# Altium PCB NNLightSwitcher.PcbDoc (part 2 of 3)
Units mil, origin at the board's own origin, x right, y up, seen from the top; angles counter-clockwise.
Board outline 1590 x 2535 mil, 2 copper layers (Top Layer, Bottom Layer); 347 components, 370 nets, 1639 pads, 0 vias.
Unrouted connection lines stored in the file: 1035.
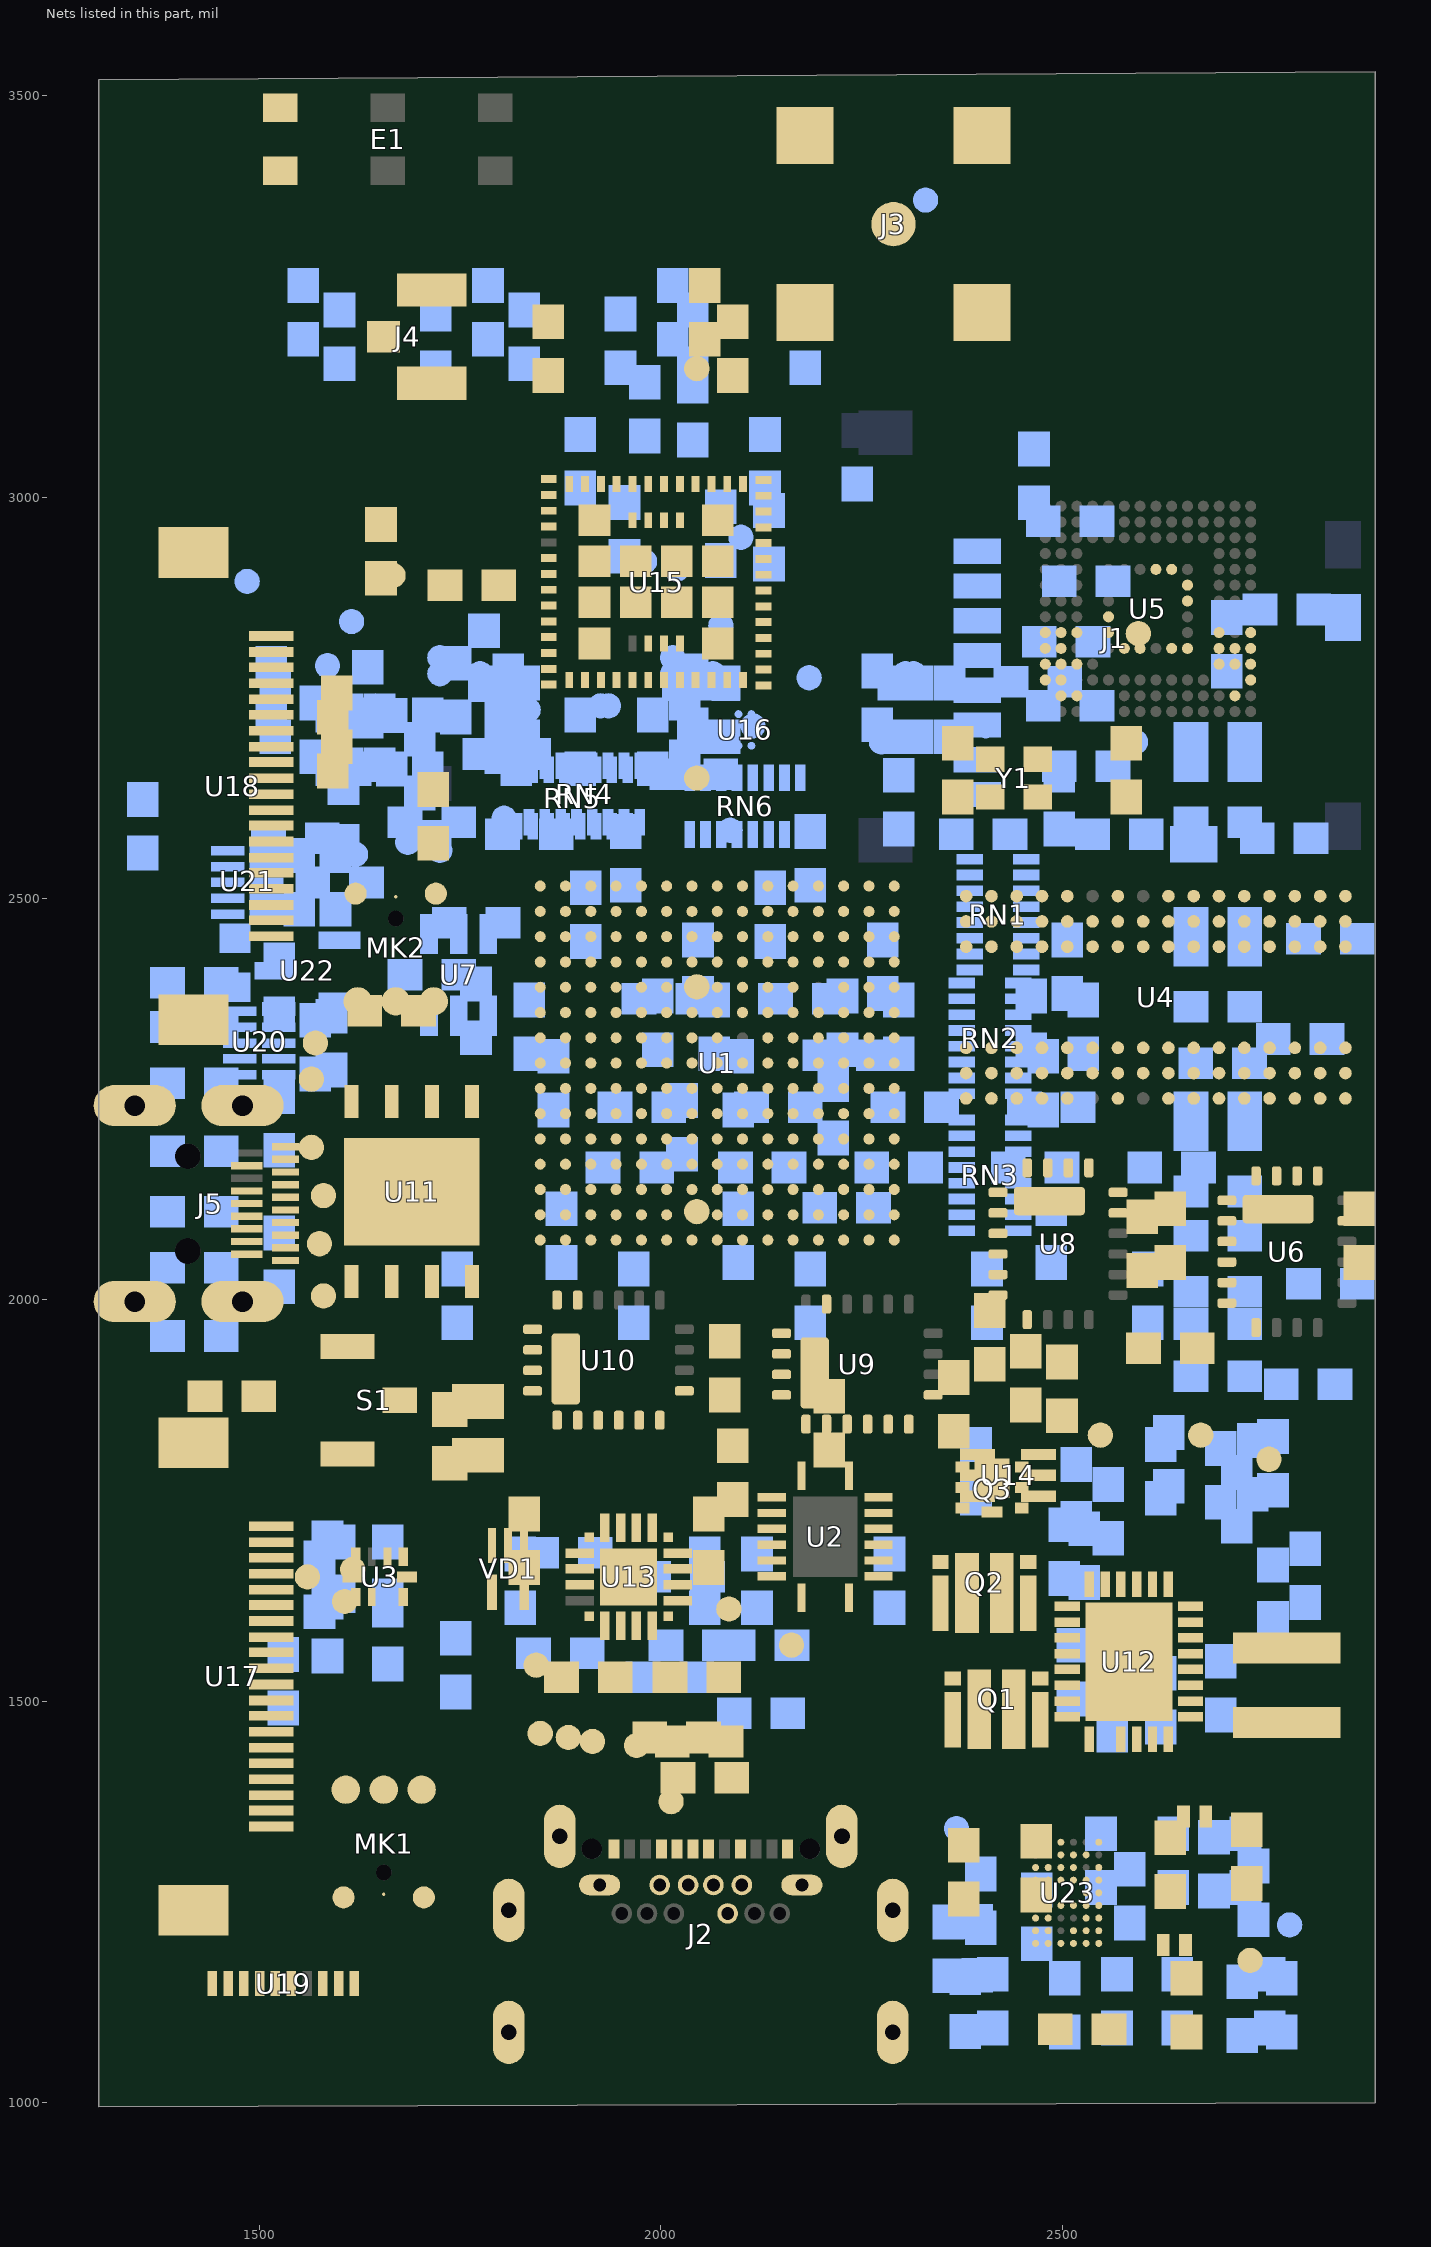
[diagram p2: the nets of this part, all layers, seen from the top]

## Part data
C1 C3 C5 C6 C7 C8 C9 C12 C13 C14 C17 C19 C20 C24 C26 C27 C28 C32 C33 C34 C43 C46 C48 C49 C50 C51 C52 C53 C55 C58 C69: "CAP, CERM, 100 pF, 25 V,+/- 5%, C0G/NP0, 0201", Alternate PartNumber=C0603C0G1E101J030BA, Cap_Case=0201, Manufacturer=Yageo, TempCo=C0G/NP0, Tolerance_%=5%, Value2=25V, ValueDisplayed="470 nF", AEC Category=Q200, AEC Grade=N/A, AEC Qualified=N, Cap_F=100pF, ComponentLink1Description="Datasheet link", ComponentLink1URL=http://www.yageo.com/documents/recent/UPY-GP_NP0_16V-to-50V_16.pdf, CompType=Capacitor, MountType=SMT, PackageReference=0201, PartNumber=CC0201JRNPO8BN101, Polarized=N, RoHS=Y, SizeArea_mm2=0.18, SizeAreaWB_mm2=2.08, SizeX_mm=0.6, SizeY_mm=0.3, SizeZ_mm=0.26, TaMax_C=125°C, TaMin_C=-55°C, Technology=Ceramic, U/M=EA, VDC_V=25V
C2 C4 C10 C15 C16 C18 C23 C25 C31 C35 C42 C45 C54 C57 C61 C63 C65 C67 C95 C97: "CAP, CERM, 100 pF, 25 V,+/- 5%, C0G/NP0, 0201", Alternate PartNumber=C0603C0G1E101J030BA, Cap_Case=0201, Manufacturer=Yageo, TempCo=C0G/NP0, Tolerance_%=5%, Value2=25V, ValueDisplayed="4.7 uF", AEC Category=Q200, AEC Grade=N/A, AEC Qualified=N, Cap_F=100pF, ComponentLink1Description="Datasheet link", ComponentLink1URL=http://www.yageo.com/documents/recent/UPY-GP_NP0_16V-to-50V_16.pdf, CompType=Capacitor, MountType=SMT, PackageReference=0201, PartNumber=CC0201JRNPO8BN101, Polarized=N, RoHS=Y, SizeArea_mm2=0.18, SizeAreaWB_mm2=2.08, SizeX_mm=0.6, SizeY_mm=0.3, SizeZ_mm=0.26, TaMax_C=125°C, TaMin_C=-55°C, Technology=Ceramic, U/M=EA, VDC_V=25V
C11 C21 C22 C29 C30 C60 C62 C64 C66 C68: "CAP, CERM, 100 pF, 25 V,+/- 5%, C0G/NP0, 0201", Alternate PartNumber=C0603C0G1E101J030BA, Cap_Case=0201, Manufacturer=Yageo, TempCo=C0G/NP0, Tolerance_%=5%, Value2=25V, ValueDisplayed="47 uF", AEC Category=Q200, AEC Grade=N/A, AEC Qualified=N, Cap_F=100pF, ComponentLink1Description="Datasheet link", ComponentLink1URL=http://www.yageo.com/documents/recent/UPY-GP_NP0_16V-to-50V_16.pdf, CompType=Capacitor, MountType=SMT, PackageReference=0201, PartNumber=CC0201JRNPO8BN101, Polarized=N, RoHS=Y, SizeArea_mm2=0.18, SizeAreaWB_mm2=2.08, SizeX_mm=0.6, SizeY_mm=0.3, SizeZ_mm=0.26, TaMax_C=125°C, TaMin_C=-55°C, Technology=Ceramic, U/M=EA, VDC_V=25V
C36 C38: "CAP, CERM, 0.01 µF, 50 V,+/- 10%, X7R, 0402", Alternate PartNumber=C1005X7R1C103K050BA, Cap_Case=0402, Manufacturer=Walsin, TempCo=X7R, Tolerance_%=10%, Value2=50V, ValueDisplayed="1 uF", AEC Category=Q200, AEC Grade=N/A, AEC Qualified=N, Cap_F=10nF, ComponentLink1Description="Datasheet link", ComponentLink1URL=http://www.passivecomponent.com/indexsea/0402B103K500CT-IN.pdf, CompType=Capacitor, MountType=SMT, PackageReference=0402, PartNumber=0402B103K500CT, Polarized=N, RoHS=Y, SizeArea_mm2=0.5, SizeAreaWB_mm2=3, SizeX_mm=1, SizeY_mm=0.5, SizeZ_mm=0.6, TaMax_C=125°C, TaMin_C=-55°C, Technology=Ceramic, U/M=EA, VDC_V=50V
C37 C39 C93 C94 C96: "CAP, CERM, 100 pF, 25 V,+/- 5%, C0G/NP0, 0201", Alternate PartNumber=C0603C0G1E101J030BA, Cap_Case=0201, Manufacturer=Yageo, TempCo=C0G/NP0, Tolerance_%=5%, Value2=25V, ValueDisplayed="0.1 uF", AEC Category=Q200, AEC Grade=N/A, AEC Qualified=N, Cap_F=100pF, ComponentLink1Description="Datasheet link", ComponentLink1URL=http://www.yageo.com/documents/recent/UPY-GP_NP0_16V-to-50V_16.pdf, CompType=Capacitor, MountType=SMT, PackageReference=0201, PartNumber=CC0201JRNPO8BN101, Polarized=N, RoHS=Y, SizeArea_mm2=0.18, SizeAreaWB_mm2=2.08, SizeX_mm=0.6, SizeY_mm=0.3, SizeZ_mm=0.26, TaMax_C=125°C, TaMin_C=-55°C, Technology=Ceramic, U/M=EA, VDC_V=25V
C40 C41 C44 C47 C56 C59: "CAP, CERM, 100 pF, 25 V,+/- 5%, C0G/NP0, 0201", Alternate PartNumber=C0603C0G1E101J030BA, Cap_Case=0201, Manufacturer=Yageo, TempCo=C0G/NP0, Tolerance_%=5%, Value2=25V, ValueDisplayed="10 nF", AEC Category=Q200, AEC Grade=N/A, AEC Qualified=N, Cap_F=100pF, ComponentLink1Description="Datasheet link", ComponentLink1URL=http://www.yageo.com/documents/recent/UPY-GP_NP0_16V-to-50V_16.pdf, CompType=Capacitor, MountType=SMT, PackageReference=0201, PartNumber=CC0201JRNPO8BN101, Polarized=N, RoHS=Y, SizeArea_mm2=0.18, SizeAreaWB_mm2=2.08, SizeX_mm=0.6, SizeY_mm=0.3, SizeZ_mm=0.26, TaMax_C=125°C, TaMin_C=-55°C, Technology=Ceramic, U/M=EA, VDC_V=25V
C70: "CAP, CERM, 0.5 pF, 50 V,+/- 20%, C0G/NP0, 0402", Cap_Case=0402, Manufacturer=MuRata, Supplier Part Number 1=490-8105-1-ND, TempCo=C0G/NP0, Tolerance_%=20%, Value2=50V, ValueDisplayed="2.2 nF 2 kV", AEC Category=Q200, AEC Grade=N/A, AEC Qualified=N, Cap_F=0.5pF, ComponentLink1Description="Datasheet link", ComponentLink1URL=https://search.murata.co.jp/Ceramy/image/img/A01X/G101/ENG/GJM1555C1HR50BB01-01.pdf, CompType=Capacitor, Green_EU RoHS=Passed, Green_EU RoHS-2=Incomplete, Green_Lifecycle=Active, Green_REACh=Passed, MountType=SMT, PackageReference=0402, PartNumber=GJM1555C1HR50BB01J, Polarized=N, RoHS=Y, SizeArea_mm2=0.5, SizeAreaWB_mm2=3, SizeX_mm=1, SizeY_mm=0.5, SizeZ_mm=0.6, Supplier 1=Digi-Key, Supplier 2=Mouser, Supplier Part Number 2=81-GJM1555C1HR50BB1J, TaMax_C=125°C, TaMin_C=-55°C, Technology=Ceramic, U/M=EA, VDC_V=50V
C71 C77 C78 C79: "CAP, CERM, 0.5 pF, 50 V,+/- 20%, C0G/NP0, 0402", Cap_Case=0402, Manufacturer=MuRata, Supplier Part Number 1=490-8105-1-ND, TempCo=C0G/NP0, Tolerance_%=20%, Value2=50V, ValueDisplayed="0.1 uF", AEC Category=Q200, AEC Grade=N/A, AEC Qualified=N, Cap_F=0.5pF, ComponentLink1Description="Datasheet link", ComponentLink1URL=https://search.murata.co.jp/Ceramy/image/img/A01X/G101/ENG/GJM1555C1HR50BB01-01.pdf, CompType=Capacitor, Green_EU RoHS=Passed, Green_EU RoHS-2=Incomplete, Green_Lifecycle=Active, Green_REACh=Passed, MountType=SMT, PackageReference=0402, PartNumber=GJM1555C1HR50BB01J, Polarized=N, RoHS=Y, SizeArea_mm2=0.5, SizeAreaWB_mm2=3, SizeX_mm=1, SizeY_mm=0.5, SizeZ_mm=0.6, Supplier 1=Digi-Key, Supplier 2=Mouser, Supplier Part Number 2=81-GJM1555C1HR50BB1J, TaMax_C=125°C, TaMin_C=-55°C, Technology=Ceramic, U/M=EA, VDC_V=50V
C72: "CAP, CERM, 0.5 pF, 50 V,+/- 20%, C0G/NP0, 0402", Cap_Case=0402, Manufacturer=MuRata, Supplier Part Number 1=490-8105-1-ND, TempCo=C0G/NP0, Tolerance_%=20%, Value2=50V, ValueDisplayed="22 uF", AEC Category=Q200, AEC Grade=N/A, AEC Qualified=N, Cap_F=0.5pF, ComponentLink1Description="Datasheet link", ComponentLink1URL=https://search.murata.co.jp/Ceramy/image/img/A01X/G101/ENG/GJM1555C1HR50BB01-01.pdf, CompType=Capacitor, Green_EU RoHS=Passed, Green_EU RoHS-2=Incomplete, Green_Lifecycle=Active, Green_REACh=Passed, MountType=SMT, PackageReference=0402, PartNumber=GJM1555C1HR50BB01J, Polarized=N, RoHS=Y, SizeArea_mm2=0.5, SizeAreaWB_mm2=3, SizeX_mm=1, SizeY_mm=0.5, SizeZ_mm=0.6, Supplier 1=Digi-Key, Supplier 2=Mouser, Supplier Part Number 2=81-GJM1555C1HR50BB1J, TaMax_C=125°C, TaMin_C=-55°C, Technology=Ceramic, U/M=EA, VDC_V=50V
C73: "CAP, CERM, 0.5 pF, 50 V,+/- 20%, C0G/NP0, 0402", Cap_Case=0402, Manufacturer=MuRata, Supplier Part Number 1=490-8105-1-ND, TempCo=C0G/NP0, Tolerance_%=20%, Value2=50V, ValueDisplayed="10 uF", AEC Category=Q200, AEC Grade=N/A, AEC Qualified=N, Cap_F=0.5pF, ComponentLink1Description="Datasheet link", ComponentLink1URL=https://search.murata.co.jp/Ceramy/image/img/A01X/G101/ENG/GJM1555C1HR50BB01-01.pdf, CompType=Capacitor, Green_EU RoHS=Passed, Green_EU RoHS-2=Incomplete, Green_Lifecycle=Active, Green_REACh=Passed, MountType=SMT, PackageReference=0402, PartNumber=GJM1555C1HR50BB01J, Polarized=N, RoHS=Y, SizeArea_mm2=0.5, SizeAreaWB_mm2=3, SizeX_mm=1, SizeY_mm=0.5, SizeZ_mm=0.6, Supplier 1=Digi-Key, Supplier 2=Mouser, Supplier Part Number 2=81-GJM1555C1HR50BB1J, TaMax_C=125°C, TaMin_C=-55°C, Technology=Ceramic, U/M=EA, VDC_V=50V
C74 C75: "CAP, CERM, 0.5 pF, 50 V,+/- 20%, C0G/NP0, 0402", Cap_Case=0402, Manufacturer=MuRata, Supplier Part Number 1=490-8105-1-ND, TempCo=C0G/NP0, Tolerance_%=20%, Value2=50V, ValueDisplayed="10 pF", AEC Category=Q200, AEC Grade=N/A, AEC Qualified=N, Cap_F=0.5pF, ComponentLink1Description="Datasheet link", ComponentLink1URL=https://search.murata.co.jp/Ceramy/image/img/A01X/G101/ENG/GJM1555C1HR50BB01-01.pdf, CompType=Capacitor, Green_EU RoHS=Passed, Green_EU RoHS-2=Incomplete, Green_Lifecycle=Active, Green_REACh=Passed, MountType=SMT, PackageReference=0402, PartNumber=GJM1555C1HR50BB01J, Polarized=N, RoHS=Y, SizeArea_mm2=0.5, SizeAreaWB_mm2=3, SizeX_mm=1, SizeY_mm=0.5, SizeZ_mm=0.6, Supplier 1=Digi-Key, Supplier 2=Mouser, Supplier Part Number 2=81-GJM1555C1HR50BB1J, TaMax_C=125°C, TaMin_C=-55°C, Technology=Ceramic, U/M=EA, VDC_V=50V
C76: "CAP, CERM, 0.5 pF, 50 V,+/- 20%, C0G/NP0, 0402", Cap_Case=0402, Manufacturer=MuRata, Supplier Part Number 1=490-8105-1-ND, TempCo=C0G/NP0, Tolerance_%=20%, Value2=50V, ValueDisplayed="0.047 uF", AEC Category=Q200, AEC Grade=N/A, AEC Qualified=N, Cap_F=0.5pF, ComponentLink1Description="Datasheet link", ComponentLink1URL=https://search.murata.co.jp/Ceramy/image/img/A01X/G101/ENG/GJM1555C1HR50BB01-01.pdf, CompType=Capacitor, Green_EU RoHS=Passed, Green_EU RoHS-2=Incomplete, Green_Lifecycle=Active, Green_REACh=Passed, MountType=SMT, PackageReference=0402, PartNumber=GJM1555C1HR50BB01J, Polarized=N, RoHS=Y, SizeArea_mm2=0.5, SizeAreaWB_mm2=3, SizeX_mm=1, SizeY_mm=0.5, SizeZ_mm=0.6, Supplier 1=Digi-Key, Supplier 2=Mouser, Supplier Part Number 2=81-GJM1555C1HR50BB1J, TaMax_C=125°C, TaMin_C=-55°C, Technology=Ceramic, U/M=EA, VDC_V=50V
C80: "CAP, CERM, 0.5 pF, 50 V,+/- 20%, C0G/NP0, 0402", Cap_Case=0402, Manufacturer=MuRata, Supplier Part Number 1=490-8105-1-ND, TempCo=C0G/NP0, Tolerance_%=20%, Value2=50V, ValueDisplayed="4.7 uF", AEC Category=Q200, AEC Grade=N/A, AEC Qualified=N, Cap_F=0.5pF, ComponentLink1Description="Datasheet link", ComponentLink1URL=https://search.murata.co.jp/Ceramy/image/img/A01X/G101/ENG/GJM1555C1HR50BB01-01.pdf, CompType=Capacitor, Green_EU RoHS=Passed, Green_EU RoHS-2=Incomplete, Green_Lifecycle=Active, Green_REACh=Passed, MountType=SMT, PackageReference=0402, PartNumber=GJM1555C1HR50BB01J, Polarized=N, RoHS=Y, SizeArea_mm2=0.5, SizeAreaWB_mm2=3, SizeX_mm=1, SizeY_mm=0.5, SizeZ_mm=0.6, Supplier 1=Digi-Key, Supplier 2=Mouser, Supplier Part Number 2=81-GJM1555C1HR50BB1J, TaMax_C=125°C, TaMin_C=-55°C, Technology=Ceramic, U/M=EA, VDC_V=50V
C81: "CAP, CERM, 0.5 pF, 50 V,+/- 20%, C0G/NP0, 0402", Cap_Case=0402, Manufacturer=MuRata, Supplier Part Number 1=490-8105-1-ND, TempCo=C0G/NP0, Tolerance_%=20%, Value2=50V, ValueDisplayed="1.0 uF", AEC Category=Q200, AEC Grade=N/A, AEC Qualified=N, Cap_F=0.5pF, ComponentLink1Description="Datasheet link", ComponentLink1URL=https://search.murata.co.jp/Ceramy/image/img/A01X/G101/ENG/GJM1555C1HR50BB01-01.pdf, CompType=Capacitor, Green_EU RoHS=Passed, Green_EU RoHS-2=Incomplete, Green_Lifecycle=Active, Green_REACh=Passed, MountType=SMT, PackageReference=0402, PartNumber=GJM1555C1HR50BB01J, Polarized=N, RoHS=Y, SizeArea_mm2=0.5, SizeAreaWB_mm2=3, SizeX_mm=1, SizeY_mm=0.5, SizeZ_mm=0.6, Supplier 1=Digi-Key, Supplier 2=Mouser, Supplier Part Number 2=81-GJM1555C1HR50BB1J, TaMax_C=125°C, TaMin_C=-55°C, Technology=Ceramic, U/M=EA, VDC_V=50V
C82: "CAP, CERM, 8.2 pF, 50 V,+/- 3%, C0G/NP0, 0402", Alternate Manufacturer=MuRata, Alternate PartNumber=GRM1555C1H8R2CA01D, Cap_Case=0402, Manufacturer=Walsin, TempCo=C0G/NP0, Tolerance_%=3%, Value2=50V, ValueDisplayed=8.2pF, AEC Category=Q200, AEC Grade=N/A, AEC Qualified=N, Cap_F=8.2pF, ComponentLink1Description="Datasheet link", ComponentLink1URL=http://www.passivecomponent.com/indexsea/0402N8R2C500CT-IN.pdf, CompType=Capacitor, MountType=SMT, PackageReference=0402, PartNumber=0402N8R2C500CT, Polarized=N, RoHS=Y, SizeArea_mm2=0.5, SizeAreaWB_mm2=3, SizeX_mm=1, SizeY_mm=0.5, SizeZ_mm=0.6, TaMax_C=125°C, TaMin_C=-55°C, Technology=Ceramic, U/M=EA, VDC_V=50V
C83 C84: "CAP, CERM, 0.5 pF, 50 V,+/- 20%, C0G/NP0, 0402", Cap_Case=0402, Manufacturer=MuRata, Supplier Part Number 1=490-8105-1-ND, TempCo=C0G/NP0, Tolerance_%=20%, Value2=50V, ValueDisplayed=0.5pF, AEC Category=Q200, AEC Grade=N/A, AEC Qualified=N, Cap_F=0.5pF, ComponentLink1Description="Datasheet link", ComponentLink1URL=https://search.murata.co.jp/Ceramy/image/img/A01X/G101/ENG/GJM1555C1HR50BB01-01.pdf, CompType=Capacitor, Green_EU RoHS=Passed, Green_EU RoHS-2=Incomplete, Green_Lifecycle=Active, Green_REACh=Passed, MountType=SMT, PackageReference=0402, PartNumber=GJM1555C1HR50BB01J, Polarized=N, RoHS=Y, SizeArea_mm2=0.5, SizeAreaWB_mm2=3, SizeX_mm=1, SizeY_mm=0.5, SizeZ_mm=0.6, Supplier 1=Digi-Key, Supplier 2=Mouser, Supplier Part Number 2=81-GJM1555C1HR50BB1J, TaMax_C=125°C, TaMin_C=-55°C, Technology=Ceramic, U/M=EA, VDC_V=50V
C85 C86 C87 C88 C89 C90: "CAP, CERM, 0.5 pF, 50 V,+/- 20%, C0G/NP0, 0402", Cap_Case=0402, Manufacturer=MuRata, Supplier Part Number 1=490-8105-1-ND, TempCo=C0G/NP0, Tolerance_%=20%, Value2=50V, ValueDisplayed="0 pF", AEC Category=Q200, AEC Grade=N/A, AEC Qualified=N, Cap_F=0.5pF, ComponentLink1Description="Datasheet link", ComponentLink1URL=https://search.murata.co.jp/Ceramy/image/img/A01X/G101/ENG/GJM1555C1HR50BB01-01.pdf, CompType=Capacitor, Green_EU RoHS=Passed, Green_EU RoHS-2=Incomplete, Green_Lifecycle=Active, Green_REACh=Passed, MountType=SMT, PackageReference=0402, PartNumber=GJM1555C1HR50BB01J, Polarized=N, RoHS=Y, SizeArea_mm2=0.5, SizeAreaWB_mm2=3, SizeX_mm=1, SizeY_mm=0.5, SizeZ_mm=0.6, Supplier 1=Digi-Key, Supplier 2=Mouser, Supplier Part Number 2=81-GJM1555C1HR50BB1J, TaMax_C=125°C, TaMin_C=-55°C, Technology=Ceramic, U/M=EA, VDC_V=50V
C91: "CAP, CERM, 2.2 pF, 50 V,+/- 4.5%, C0G/NP0, 0402", Alternate Manufacturer=MuRata, Alternate PartNumber=GRM1555C1H2R2BA01D, Cap_Case=0402, TempCo=C0G/NP0, Tolerance_%=4.5%, Value2=50V, ValueDisplayed=2.2pF, AEC Category=Q200, AEC Grade=N/A, AEC Qualified=N, Cap_F=2.2pF, ComponentLink1Description="Datasheet link", ComponentLink1URL=https://psearch.en.murata.com/capacitor/product/GJM1555C1H2R2BB01%23.pdf, CompType=Capacitor, Manufacturer=MuRata, MountType=SMT, PackageReference=0402, PartNumber=GJM1555C1H2R2BB01D, Polarized=N, RoHS=Y, SizeArea_mm2=0.5, SizeAreaWB_mm2=3, SizeX_mm=1, SizeY_mm=0.5, SizeZ_mm=0.6, TaMax_C=125°C, TaMin_C=-55°C, Technology=Ceramic, U/M=EA, VDC_V=50V
C92: "CAP, CERM, 1 pF, 50 V, +/- 10%, C0G/NP0, 0402", Alternate Manufacturer=----, Cap_Case=0402, Manufacturer=MuRata, PartNumber=GRM1555C1H1R0BA01D, Supplier Part Number 1=490-6206-1-ND, TempCo=C0G/NP0, Tolerance_%=10%, Value1=Unknown, Value2=50V, ValueDisplayed=1pF, AEC Category=Q200, AEC Qualified=?, Alternate PartNumber=----, Cap_F=1pF, ComponentLink1Description="Datasheet link", ComponentLink1URL=http://psearch.murata.com/capacitor/product/GRM1555C1H1R0BA01%23.pdf, CompType=Capacitor, LatestRevisionDate=2017-03-09, MountType=SMT, PackageReference=0402, Polarized=N, Published=2008-06-19, Publisher="Texas Instruments", RoHS=Y, SizeArea_mm2=0.5, SizeAreaWB_mm2=3, SizeX_mm=1, SizeY_mm=0.5, SizeZ_mm=0.6, Supplier 1=Digi-Key, Supplier 2=Mouser, Supplier Part Number 2=81-GRM1555C1H1R0BA1D, TaMax_C=125°C, TaMin_C=-55°C, Technology=Ceramic, U/M=EA, VDC_V=50V
C98: "CAP, CERM, 100 pF, 25 V,+/- 5%, C0G/NP0, 0201", Alternate PartNumber=C0603C0G1E101J030BA, Cap_Case=0201, Manufacturer=Yageo, TempCo=C0G/NP0, Tolerance_%=5%, Value2=25V, ValueDisplayed="15 pF", AEC Category=Q200, AEC Grade=N/A, AEC Qualified=N, Cap_F=100pF, ComponentLink1Description="Datasheet link", ComponentLink1URL=http://www.yageo.com/documents/recent/UPY-GP_NP0_16V-to-50V_16.pdf, CompType=Capacitor, MountType=SMT, PackageReference=0201, PartNumber=CC0201JRNPO8BN101, Polarized=N, RoHS=Y, SizeArea_mm2=0.18, SizeAreaWB_mm2=2.08, SizeX_mm=0.6, SizeY_mm=0.3, SizeZ_mm=0.26, TaMax_C=125°C, TaMin_C=-55°C, Technology=Ceramic, U/M=EA, VDC_V=25V
C99 C100 C101 C102: "CAP, CERM, 100 pF, 25 V,+/- 5%, C0G/NP0, 0201", Alternate PartNumber=C0603C0G1E101J030BA, Cap_Case=0201, Manufacturer=Yageo, TempCo=C0G/NP0, Tolerance_%=5%, Value2=25V, ValueDisplayed="100 nF", AEC Category=Q200, AEC Grade=N/A, AEC Qualified=N, Cap_F=100pF, ComponentLink1Description="Datasheet link", ComponentLink1URL=http://www.yageo.com/documents/recent/UPY-GP_NP0_16V-to-50V_16.pdf, CompType=Capacitor, MountType=SMT, PackageReference=0201, PartNumber=CC0201JRNPO8BN101, Polarized=N, RoHS=Y, SizeArea_mm2=0.18, SizeAreaWB_mm2=2.08, SizeX_mm=0.6, SizeY_mm=0.3, SizeZ_mm=0.26, TaMax_C=125°C, TaMin_C=-55°C, Technology=Ceramic, U/M=EA, VDC_V=25V
C103 C104: "CAP, CERM, 100 pF, 25 V,+/- 5%, C0G/NP0, 0201", Alternate PartNumber=C0603C0G1E101J030BA, Cap_Case=0201, Manufacturer=Yageo, TempCo=C0G/NP0, Tolerance_%=5%, Value2=25V, ValueDisplayed="15 nF", AEC Category=Q200, AEC Grade=N/A, AEC Qualified=N, Cap_F=100pF, ComponentLink1Description="Datasheet link", ComponentLink1URL=http://www.yageo.com/documents/recent/UPY-GP_NP0_16V-to-50V_16.pdf, CompType=Capacitor, MountType=SMT, PackageReference=0201, PartNumber=CC0201JRNPO8BN101, Polarized=N, RoHS=Y, SizeArea_mm2=0.18, SizeAreaWB_mm2=2.08, SizeX_mm=0.6, SizeY_mm=0.3, SizeZ_mm=0.26, TaMax_C=125°C, TaMin_C=-55°C, Technology=Ceramic, U/M=EA, VDC_V=25V
C105 C107: "CAP, CERM, 100 pF, 25 V,+/- 5%, C0G/NP0, 0201", Alternate PartNumber=C0603C0G1E101J030BA, Cap_Case=0201, Manufacturer=Yageo, TempCo=C0G/NP0, Tolerance_%=5%, Value2=25V, ValueDisplayed="47 nF", AEC Category=Q200, AEC Grade=N/A, AEC Qualified=N, Cap_F=100pF, ComponentLink1Description="Datasheet link", ComponentLink1URL=http://www.yageo.com/documents/recent/UPY-GP_NP0_16V-to-50V_16.pdf, CompType=Capacitor, MountType=SMT, PackageReference=0201, PartNumber=CC0201JRNPO8BN101, Polarized=N, RoHS=Y, SizeArea_mm2=0.18, SizeAreaWB_mm2=2.08, SizeX_mm=0.6, SizeY_mm=0.3, SizeZ_mm=0.26, TaMax_C=125°C, TaMin_C=-55°C, Technology=Ceramic, U/M=EA, VDC_V=25V
C106: "CAP, CERM, 100 pF, 25 V,+/- 5%, C0G/NP0, 0201", Alternate PartNumber=C0603C0G1E101J030BA, Cap_Case=0201, Manufacturer=Yageo, TempCo=C0G/NP0, Tolerance_%=5%, Value2=25V, ValueDisplayed="2.2 nF", AEC Category=Q200, AEC Grade=N/A, AEC Qualified=N, Cap_F=100pF, ComponentLink1Description="Datasheet link", ComponentLink1URL=http://www.yageo.com/documents/recent/UPY-GP_NP0_16V-to-50V_16.pdf, CompType=Capacitor, MountType=SMT, PackageReference=0201, PartNumber=CC0201JRNPO8BN101, Polarized=N, RoHS=Y, SizeArea_mm2=0.18, SizeAreaWB_mm2=2.08, SizeX_mm=0.6, SizeY_mm=0.3, SizeZ_mm=0.26, TaMax_C=125°C, TaMin_C=-55°C, Technology=Ceramic, U/M=EA, VDC_V=25V
C108 C109 C110 C112 C113: "CAP, CERM, 100 pF, 25 V,+/- 5%, C0G/NP0, 0201", Alternate PartNumber=C0603C0G1E101J030BA, Cap_Case=0201, Manufacturer=Yageo, TempCo=C0G/NP0, Tolerance_%=5%, Value2=25V, ValueDisplayed="10 uF 10V", AEC Category=Q200, AEC Grade=N/A, AEC Qualified=N, Cap_F=100pF, ComponentLink1Description="Datasheet link", ComponentLink1URL=http://www.yageo.com/documents/recent/UPY-GP_NP0_16V-to-50V_16.pdf, CompType=Capacitor, MountType=SMT, PackageReference=0201, PartNumber=CC0201JRNPO8BN101, Polarized=N, RoHS=Y, SizeArea_mm2=0.18, SizeAreaWB_mm2=2.08, SizeX_mm=0.6, SizeY_mm=0.3, SizeZ_mm=0.26, TaMax_C=125°C, TaMin_C=-55°C, Technology=Ceramic, U/M=EA, VDC_V=25V
C111: "CAP, CERM, 100 pF, 25 V,+/- 5%, C0G/NP0, 0201", Alternate PartNumber=C0603C0G1E101J030BA, Cap_Case=0201, Manufacturer=Yageo, TempCo=C0G/NP0, Tolerance_%=5%, Value2=25V, ValueDisplayed="1 uF", AEC Category=Q200, AEC Grade=N/A, AEC Qualified=N, Cap_F=100pF, ComponentLink1Description="Datasheet link", ComponentLink1URL=http://www.yageo.com/documents/recent/UPY-GP_NP0_16V-to-50V_16.pdf, CompType=Capacitor, MountType=SMT, PackageReference=0201, PartNumber=CC0201JRNPO8BN101, Polarized=N, RoHS=Y, SizeArea_mm2=0.18, SizeAreaWB_mm2=2.08, SizeX_mm=0.6, SizeY_mm=0.3, SizeZ_mm=0.26, TaMax_C=125°C, TaMin_C=-55°C, Technology=Ceramic, U/M=EA, VDC_V=25V
C114: "CAP, CERM, 100 pF, 25 V,+/- 5%, C0G/NP0, 0201", Alternate PartNumber=C0603C0G1E101J030BA, Cap_Case=0201, Manufacturer=Yageo, TempCo=C0G/NP0, Tolerance_%=5%, Value2=25V, ValueDisplayed="1 uF 16V", AEC Category=Q200, AEC Grade=N/A, AEC Qualified=N, Cap_F=100pF, ComponentLink1Description="Datasheet link", ComponentLink1URL=http://www.yageo.com/documents/recent/UPY-GP_NP0_16V-to-50V_16.pdf, CompType=Capacitor, MountType=SMT, PackageReference=0201, PartNumber=CC0201JRNPO8BN101, Polarized=N, RoHS=Y, SizeArea_mm2=0.18, SizeAreaWB_mm2=2.08, SizeX_mm=0.6, SizeY_mm=0.3, SizeZ_mm=0.26, TaMax_C=125°C, TaMin_C=-55°C, Technology=Ceramic, U/M=EA, VDC_V=25V
D1 D2: "ESD Suppressor TVS 30KV", Package=None, Availability=Unavailable, MF="Nexperia USA", MP=PESD12VS1UL, Price=None, SnapEDA_Link=https://www.snapeda.com/parts/PESD12VS1UL/Nexperia%20USA%20Inc./view-part/?ref=snap
E1: "WLAN ANTENNA 802.11, SMD", Alternate Manufacturer=----, Manufacturer=Ethertronics, PartNumber=M830520, Alternate PartNumber=----, ComponentLink1Description="Datasheet URL", ComponentLink1URL=http://www.ethertronics.com/files/6014/0708/4228/Savvi_WLAN__8x3_M830510.pdf, CompType=Antenna, LatestRevisionDate=09/03/2017, MountType=SMT, PackageReference=8x3mm, Publisher="Texas Instruments", RoHS=Y, SizeArea_mm2=24, SizeAreaWB_mm2=50, SizeX_mm=3, SizeY_mm=8, SizeZ_mm=1.33
FB1: "Ind Chip Bead Multi-Layer 220Ohm 25% 100MHz Ferrite 2.2A 0603 Punched Paper T/R", Package="0603 TDK", Digi-Key_Part_Number=445-1565-1-ND, Digi-Key_Purchase_URL=https://www.digikey.com/product-detail/en/tdk-corporation/MPZ1608S221ATA00/445-1565-1-ND/571895?utm_source=snapeda&utm_medium=aggregator&utm_campaign=symbol, MF=TDK, MP=MPZ1608S221ATA00, SnapEDA_Link=https://www.snapeda.com/parts/MPZ1608S221ATA00/TDK-Lambda%20Americas%20Inc/view-part/?ref=snap
J1: "1.10mm Pitch microSD Memory Card Connector%2C Normal Mount Surface Mount%2C Push-Push Type", ??????=??????, ?????????????=Molex
J2: "Conn USB 3.1 Type C RCP 24 POS Solder RA SMD/Thru-Hole 24 Terminal 1 Port Automotive T/R", Package=None, Availability=Unavailable, Centerline_Pitch=".5 mm[.019 in]", MF="TE Connectivity", MP=2129691-1, Number_of_Positions=24, Price=None, Product_Type=Connector, SnapEDA_Link=https://www.snapeda.com/parts/2129691-1/TE%20Connectivity%20AMP%20Connectors/view-part/?ref=snap, TE_purchase_URL=https://www.te.com/usa-en/product-2129691-1.html?te_bu=Cor&te_type=disp&te_campaign=seda_glo_cor-seda-global-disp-prtnr-fy19-seda-model-bom-cta_sma-317_1&elqCampaignId=32493
J3: "Connector, SMA, Vertical, Gold, SMT", Alternate Manufacturer=??, Alternate PartNumber=SMA-050710, Manufacturer="Hus-Tsan Group Co., Ltd.", PartNumber=SMA-10V21-TGG, CNHeader=FALSE, ComponentLink1Description="Datasheet URL", ComponentLink1URL=https://sps06.itg.ti.com/sites/KMS/crossdivteams/altium/docs/ComponentDatasheets/SMA-10V21.pdf, CompType=SMA, CT=TRUE, LatestRevisionDate=26/05/2017, MountType=SMT, PackageReference="SMD, 4-Leads, Body 7.1x7.1mm", Publisher="Texas Instruments", RoHS=Y
J4: "Receptacle, Ultra Miniature Coaxial, Male Pin, 50 ohm, SMT", Alternate Manufacturer=----, Color=Beige, Manufacturer="Hirose Electric Co. Ltd.", Supplier Part Number 1=H122041-ND, Alternate PartNumber=----, CNHeader=False, ComponentLink1Description="Datasheet URL", ComponentLink1URL=https://www.hirose.com/product/en/download_file/key_name/U.FL%2DR%2DSMT%2D1%2801%29/category/Drawing%20(2D)/doc_file_id/37625/?file_category_id=6&item_id=03310472201&is_series=, CompType=Receptacle, ContactFinish=Gold, CT=False, Gender=Female, LatestRevisionDate=2017-07-12, MountType=SMT, Orientation=Vertical, PackageReference="Ultra small CO-AX SMD", PartNumber=U.FL-R-SMT-1(01), PinCount=3, Publisher="Texas Instruments", RoHS=Y, Supplier 1=Digi-Key, Supplier 2=Newark, Supplier 3=Mouser, Supplier Part Number 2=18K7517, Supplier Part Number 3=798-U.FL-R-SMT01
J5: "Micro Hdmi Conn, Rcpt, 19pos, r/a, Smt", Package=None, Availability=Unavailable, MF="Wurth Electronics", MP=685119248123, Price=None, SnapEDA_Link=https://www.snapeda.com/parts/685119248123/Wurth%20Electronics%20Inc./view-part/?ref=snap
L1 L2 L3 L4 L5: "Inductor, Multilayer, Ferrite bad", Manufacturer=MuRata, PartNumber=LQG15HS3N9S02D, Supplier Part Number 1=490-2617-1-ND, Value1="0.14 ohm", Value2=0.75A, AEC Category=Q200, AEC Grade=N/A, AEC Qualified=N, ComponentLink1Description="Datasheet link", ComponentLink1URL=https://search.murata.co.jp/Ceramy/image/img/P02/JELF243B-0010.pdf, CompType=Inductor, DCR_ohm=0.14, Green_EU RoHS=Passed, Green_EU RoHS-2=Incomplete, Green_Lifecycle=Active, Green_REACh=Passed, Imax_A=750mA, Ind_H=3.9nH, Irms="0.75A @ 25C rise", Material="Air Core", MountType=SMT, PackageReference="0402 polarized", RoHS=Y, SizeArea_mm2=0.5, SizeAreaWB_mm2=3, SizeX_mm=1, SizeY_mm=0.5, SizeZ_mm=0.55, Supplier 1=Digi-Key, Supplier 2=Mouser, Supplier Part Number 2=81-LQG15HS3N9S02D, Technology=Multilayer, ValueDisplayed=BKP0603HS121-T
L6: "Power inductor, shielded, 20% tol, SMT, RoHS, halogen free", Package=None, Availability=Unavailable, MF=Coilcraft, MP=XFL4020-102MEC, Price=None, SnapEDA_Link=https://www.snapeda.com/parts/XFL4020-102MEC/Coilcraft/view-part/?ref=snap
L7: "Inductor, Multilayer, Air Core, 3.9 nH, 0.75 A, 0.14 ohm, SMD", Manufacturer=MuRata, PartNumber=LQG15HS3N9S02D, Supplier Part Number 1=490-2617-1-ND, Value1="0.14 ohm", Value2=0.75A, ValueDisplayed=3.9nH, AEC Category=Q200, AEC Grade=N/A, AEC Qualified=N, ComponentLink1Description="Datasheet link", ComponentLink1URL=https://search.murata.co.jp/Ceramy/image/img/P02/JELF243B-0010.pdf, CompType=Inductor, DCR_ohm=0.14, Green_EU RoHS=Passed, Green_EU RoHS-2=Incomplete, Green_Lifecycle=Active, Green_REACh=Passed, Imax_A=750mA, Ind_H=3.9nH, Irms="0.75A @ 25C rise", Material="Air Core", MountType=SMT, PackageReference="0402 polarized", RoHS=Y, SizeArea_mm2=0.5, SizeAreaWB_mm2=3, SizeX_mm=1, SizeY_mm=0.5, SizeZ_mm=0.55, Supplier 1=Digi-Key, Supplier 2=Mouser, Supplier Part Number 2=81-LQG15HS3N9S02D, Technology=Multilayer
L8: "Inductor Power Chip Shielded Multi-Layer 2.2uH 20% 1MHz Ferrite 750mA 375mOhm DCR 0603 T/R", Package="0603 Murata", Digi-Key_Part_Number=490-10764-1-ND, Digi-Key_Purchase_URL=https://www.digikey.com/product-detail/en/murata-electronics-north-america/LQM18PN2R2MFRL/490-10764-1-ND/5251335?utm_source=snapeda&utm_medium=aggregator&utm_campaign=symbol, MF="Murata Electronics", MP=LQM18PN2R2MFRL, SnapEDA_Link=https://www.snapeda.com/parts/LQM18PN2R2MFRL/Murata%20Electronics%20North%20America/view-part/?ref=snap
MK1 MK2: "High SPL Analog MEMS Microphone with Extended Low Feq Response", Package="LGA-6 TDK-InvenSense", Availability=Unavailable, MF="TDK InvenSense", MP=ICS-40300, Price=None, SnapEDA_Link=https://www.snapeda.com/parts/ICS-40300/TDK%20InvenSense/view-part/?ref=snap
Q1 Q2: "Dual Pt8 n 40/20v Syncfet In Mlp3x3 / Tape Reel", Package="PowerWDFN-8 ON Semiconductor", Availability=Unavailable, MF="ON Semiconductor", MP=FDMC8030, Price=None, SnapEDA_Link=https://www.snapeda.com/parts/FDMC8030/ON%20Semiconductor/view-part/?ref=snap
Q3: "Power MOSFET -20V -8.2A 18 mOhm Single P-Channel UDFN6 with ESD Protection", Package="UDFN-6 ON Semiconductor", Availability=Unavailable, MF="ON Semiconductor", MP=NTLUS3A18PZTAG, Price=None, SnapEDA_Link=https://www.snapeda.com/parts/NTLUS3A18PZTAG/ON%20Semiconductor/view-part/?ref=snap
R1 R2 R3 R4 R5 R6 R7 R8 R9 R10 R11 R12 R13 R14 R15 R16 R17 R107 R108 R109 R110 R111 R112 R113 R114 R115 R116 R117 R118: library part CRCW060312R0FKEA, "0603 0.1 W Film Chip Resistor", Package="0603 Vishay", Availability=Unavailable, MF="Vishay Dale", MP=CRCW060312R0FKEA, Price=None, SnapEDA_Link=https://www.snapeda.com/parts/CRCW060312R0FKEA/Vishay%20Dale/view-part/?ref=snap
R18 R19 R20 R21 R22 R23 R24 R25 R26 R27 R28 R29 R30 R31 R32 R33 R34 R35 R36 R37 R38 R39 R40 R41 R42 R43 R44 R45 R46 R47 R48 R49 R50 R51 R52 R53 R54 R55 R56 R57 R58 R59 R60 R61 R62 R63 R64 R65 R66 R67 R68 R69 R70 R71 R72 R73 R74 R75 R76 R77 R78 R79 R80 R81 R82 R83 R84 R85 R86 R87 R88 R89 R90 R91 R92 R93 R94 R95 R96 R97 R98 R99 R100 R101 R102 R103 R104 R105 R106: library part CRCW060312R0FKEA, "CRCW Series 0603 0.1 W 12 Ohm ±1 % ±100 ppm/K SMT Thick Film Chip Resistor", Package="0603 Vishay", Availability=Unavailable, MF="Vishay Dale", MP=CRCW060312R0FKEA, Price=None, SnapEDA_Link=https://www.snapeda.com/parts/CRCW060312R0FKEA/Vishay%20Dale/view-part/?ref=snap
RN1 RN2 RN3 RN4 RN5 RN6: "Res Thick Film Array 430 Ohm 5% 1/4W ±200ppm/°C ISOL Molded 16-Pin 1506_8 X 0402_ Convex SMD Punched Carrier T/R", Package="1506 Panasonic", Availability=Unavailable, MF="Panasonic Electronic", MP=EXB-2HV431JV, Price=None, SnapEDA_Link=https://www.snapeda.com/parts/EXB-2HV431JV/Panasonic%20Electronic%20Components/view-part/?ref=snap
S1: "Switch Tactile N.O. SPST Projected Plunger PC Pins 0.05A 24VDC 1.47N Thru-Hole Bag", Package=None, Availability=Unavailable, MF=Omron, MP=B3U-1100P, Price=None, SnapEDA_Link=https://www.snapeda.com/parts/B3U-1100P/Omron%20Electronics%20Inc-EMC%20Div/view-part/?ref=snap
TP1 TP2 TP3 TP4 TP5 TP6 TP7 TP8 TP9 TP10 TP11 TP12 TP13 TP14 TP15 TP16 TP17 TP18 TP19 TP20 TP21 TP22 TP23 TP24 TP25 TP26 TP27 TP28 TP29 TP30 TP31 TP32 TP33 TP34 TP35 TP36 TP37 TP38 TP39 TP40 TP41 TP42 TP43 TP44 TP45 TP46 TP47 TP48 TP49 TP50 TP51 TP52 TP53 TP54 TP55 TP56 TP57 TP58 TP59 TP60 TP61: library part "Test point", "Test Point, Miniature, SMT", Alternate Manufacturer=----, Manufacturer=Keystone, Supplier Part Number 1=36-5015TR-ND, Alternate PartNumber=----, CNHeader=FALSE, ComponentLink1Description="Datasheet URL", ComponentLink1URL=http://www.keyelco.com/userAssets/store/files/5015.PDF, CompType="Test Point", CT=TRUE, Green_EU RoHS=Passed, Green_EU RoHS-2=Incomplete, Green_Lifecycle=Active, Green_REACh=Passed, LatestRevisionDate=26/05/2017, MountType=SMT, PackageReference=Testpoint_Keystone_Miniature, PartNumber=5015, Publisher="Texas Instruments", RoHS=Y, Supplier 1=Digi-Key, Supplier 2=Mouser, Supplier Part Number 2=534-5015
U1: "IC SOC CORTEX-A9 ARTIX-7 225BGA", Case/Package=BGA, Frequency=667MHz, Manufacturer 1=Xilinx, Manufacturer Part Number 1=XC7Z010-1CLG225C, Max Operating Temperature=85°C, Min Operating Temperature=0°C, Operating Supply Voltage=1V, Supplier Part Number 1=217-XC7Z010-1CLG225C, ComponentLink1Description=https://datasheet.ciiva.com/48476/ds190-zynq-7000-overview-48476886.pdf?src-supplier=Avnet, ComponentLink1URL=https://datasheet.ciiva.com/48476/ds190-zynq-7000-overview-48476886.pdf?src-supplier=Avnet, ComponentLink2Description=https://datasheet.ciiva.com/14849/ds187-xc7z010-xc7z020-data-sheet-14849932.pdf?src-supplier=Digi-Key, ComponentLink2URL=https://datasheet.ciiva.com/14849/ds187-xc7z010-xc7z020-data-sheet-14849932.pdf?src-supplier=Digi-Key, Contact Plating=Copper, Core Architecture=ARM, Data Bus Width=32b, Interface=I2C, Max Frequency=667MHz, Number of I/Os=86, Number of Pins=225, Packaging=Tray, Peripherals=DMA, Pricing 1="1=57,74000, 10=57,74000, 50=57,74000, 100=57,74000, 1000=57,74000, 10000=57,74000 (USD)", Radiation Hardening=No, RoHS=Yes, Speed Grade=-1, Stock 1=152, Supplier 1=Mouser
U2: "PCA9546 Series 4-Channel I2C-Bus Switch w/ Interrupt Logic and Rst", Package="TSSOP-16 NXP Semiconductors", Digi-Key_Part_Number=568-2023-1-ND, Digi-Key_Purchase_URL=https://www.digikey.com/product-detail/en/nxp-usa-inc/PCA9546APW,118/568-2023-1-ND/812991?utm_source=snapeda&utm_medium=aggregator&utm_campaign=symbol, MF="NXP USA", MP=PCA9546APW,118, SnapEDA_Link=https://www.snapeda.com/parts/PCA9546APW%2C118/NXP%20USA%20Inc./view-part/?ref=snap
U3: "Low-Voltage, Rail-To-Rail Output CMOS Operational Amplifier with Shutdown, 1.5 to 5.5 V, -40 to 125 degC, 10-pin X2QFN (RUG10), Green (RoHS & no Sb/Br)", Manufacturer="Texas Instruments", Rating=Catalog, Total Supply Voltage(Max)(+5V is 5, +/-5V is 10)=5.5, Total Supply Voltage(Min)(+5V is 5, +/-5V is 10)=1.5, CMRR(Min)(dB)=50, Code_JEDEC=MO-288, ComponentLink1Description="Manufacturer URL", ComponentLink1URL=http://www.ti.com/, ComponentLink2Description=Datasheet, ComponentLink2URL=http://www.ti.com/lit/ds/symlink/tlv342s.pdf, ComponentLink3Description="Package Specification", ComponentLink3URL=http://www.ti.com/litv/pdf/mpqf216a, DatasheetVersion=SLVS568C, Eco-Plan="Green (RoHS & no Sb/Br)", GBW(Typ)(MHz)=2.2, IIB(Max)(pA)=3000, Iq per channel(Max)(mA)=0.15, Mounting Technology="Surface Mount", Number of Channels=2, Offset Drift(Typ)(uV/C)=1.9, PackageDescription="10-Pin Plastic Quad Flatpack, Body 1.5 x 2 mm", PackageReference=RUG10, PackageVersion="4208528-3/B, 04/2008", PartNumber=TLV342SIRUGR, Slew Rate(Typ)(V/us)=0.9, Sub Family="General Purpose Amplifier, Low Power Amp (<=500uA), Low Supply Voltage Amplifier (<=2.7V)", Vio (25C)(Max)(mV)=4, Vn at 1kHz(Typ)(nV/rtHz)=33
U4: "4G, 1.35V, DDR3L, 256Mx16, 1600MT/s @ 11-11-11, 96 ball BGA _9mm x13mm_ RoHS", Package="TFBGA-96 ISSI", Availability=Unavailable, MF="ISSI, Integrated", MP=IS43TR16256AL-125KBL, Price=None, SnapEDA_Link=https://www.snapeda.com/parts/IS43TR16256AL-125KBL/ISSI%2C%20Integrated%20Silicon%20Solution%20Inc/view-part/?ref=snap
U5: "J54A eMMC 32G ECCN: 3A991 / HTS: 8542.32.0070", Package="VFBGA-153 Micron", Availability=Unavailable, MF="Micron Technology", MP="MTFC4GACAAAM-1M WT", Price=None, SnapEDA_Link=https://www.snapeda.com/parts/MTFC4GACAAAM-1M%20WT/Micron%20Technology%20Inc./view-part/?ref=snap
U6 U8 U9 U10: "DC/DC", Alternate Manufacturer=----, Manufacturer=TDK, Supplier Part Number 1=445-174759-1-ND, Alternate PartNumber=----, ComponentLink1Description="Datasheet URL", ComponentLink1URL=https://sps06.itg.ti.com/sites/KMS/crossdivteams/altium/docs/ComponentDatasheets/DPX165950DT-8148A1.pdf, CompType=Diplexer, LatestRevisionDate=09/03/2017, MountType=SMT, PackageReference=1.6x0.8mm, PartNumber=EN5311QI, Publisher="Texas Instruments", RoHS=Y, SizeArea_mm2=1.28, SizeAreaWB_mm2=4.68, SizeX_mm=0.8, SizeY_mm=1.6, SizeZ_mm=0.7, Supplier 1=Digi-Key, Supplier 2=Mouser, Supplier Part Number 2=810-DPX16595DT8148A1
U7: "Ultra Low-Supply Current/Supply-Voltage Supervisory Circuits 6-SOT-23 -40 to 85", Package="SOT-23-6 Texas Instruments", Availability=Unavailable, MF="Texas Instruments", MP=TPS3106K33DBVR, Price=None, SnapEDA_Link=https://www.snapeda.com/parts/TPS3106K33DBVR/Texas%20Instruments/view-part/?ref=snap
U11: "Serial Flash Memory With Dual, Quad Spi", Package="WSON-8 Winbond", Availability=Unavailable, MF=Winbond, MP=W25Q32JVZPIQ, Price=None, SnapEDA_Link=https://www.snapeda.com/parts/W25Q32JVZPIQ/Winbond%20Electronics/view-part/?ref=snap
U12: "LTC4155 - Dual Input Power Manager/ 3.5A Li-Ion Battery Charger with I2C Control and USB OTG", Package="QFN-28 Linear Technology", Digi-Key_Part_Number=LTC4155EUFD#PBF-ND, Digi-Key_Purchase_URL=https://www.digikey.com/product-detail/en/linear-technology-analog-devices/LTC4155EUFD-PBF/LTC4155EUFD-PBF-ND/2752906?utm_source=snapeda&utm_medium=aggregator&utm_campaign=symbol, MF="Linear Technology/Analog", MP=LTC4155EUFD#PBF, SnapEDA_Link=https://www.snapeda.com/parts/LTC4155EUFD%23PBF/Analog%20Devices/view-part/?ref=snap
U13: "Ic Bridge Usb To Uart 20qfn", Package="QFN-20 Silicon Labs", Availability=Unavailable, MF="Silicon Labs", MP=CP2102N-A01-GQFN20R, Price=None, SnapEDA_Link=https://www.snapeda.com/parts/CP2102N-A01-GQFN20R/Silicon%20Labs/view-part/?ref=snap
U14: "TRANSISTOR, ARRAY, DUAL NPN, 40V, 200mA, SOT-363-6, FULL REEL", Package="SOT-363 Multicomp", Availability=Unavailable, MF=Multicomp, MP=MMDT3904-7-F, Price=None, SnapEDA_Link=https://www.snapeda.com/parts/MMDT3904-7-F/Multicomp/view-part/?ref=snap
U15: Current - Receiving=55mA, Current - Transmitting=400mA, Frequency=5GHz, Manufacturer 1=Cypress, Manufacturer Part Number 1=CYW43455XKUBGT, Max Operating Temperature=85°C, Min Operating Temperature=-30°C, Data Rate=433.3Mbps, Interface=SPI, Number of GPIO=15, Packaging="Tape and Reel", Pricing 1="1=11,04100, 10=10,17800, 25=9,54200, 100=8,48600, 250=8,08700, 500=7,59200, 1000=7,19100, 3000=6,47190 (USD)", RoHS=No, Sensitivity=-95.5dBm, Stock 1=4725, Supplier 1=Arrow, Supplier Part Number 1=CYW43455XKUBGT
U16: "Ultra Small, Ultra-Low Power 32.768 kHz TCXO", Package="UFBGA-4 SiTime", Digi-Key_Part_Number=1473-1242-1-ND, Digi-Key_Purchase_URL=https://www.digikey.com/product-detail/en/sitime/SIT1552AI-JF-DCC-32.768D/1473-1242-1-ND/5035517?utm_source=snapeda&utm_medium=aggregator&utm_campaign=symbol, MF=SiTIME, MP=SIT1552AI-JF-DCC-32.768D, SnapEDA_Link=https://www.snapeda.com/parts/SIT1552AI-JF-DCC-32.768D/SiTIME/view-part/?ref=snap
U17 U18: ".50mm FFC/FPC Connectors 20CKT RA SMT ZIF CON BOTTOM CONTACT", Package=None, Availability=Unavailable, MF=Molex, MP=52892-2095, Price=None, SnapEDA_Link=https://www.snapeda.com/parts/52892-2095/Molex/view-part/?ref=snap
U19: ".50mm FFC/FPC Connectors 10CKT RA SMT ZIF CON BOTTOM CONTACT", Package=None, Availability=Unavailable, MF=Molex, MP=52892-2095, Price=None, SnapEDA_Link=https://www.snapeda.com/parts/52892-2095/Molex/view-part/?ref=snap
U20 U21: "Common Mode Filter with ESD Protection, -40 to 85 degC, 10-Pin WDFN, Pb-Free, Tape and Reel", Manufacturer="On Semiconductor", ComponentLink1Description="Manufacturer URL", ComponentLink1URL=http://www.onsemi.com/, ComponentLink2Description=Datasheet, ComponentLink2URL=http://www.onsemi.cn/pub_link/Collateral/EMI4192-D.PDF, ComponentLink3Description="Package Specification", ComponentLink3URL=http://www.onsemi.cn/pub_link/Collateral/511BM.PDF, C Typ (pF)=0.8, DatasheetVersion="Rev. 2", Mounting Technology="Surface Mount", Number of Lines=4, PackageDescription="10-Pin Small Outline No-Lead, Body 2.5 x 2 mm, Pitch 0.5 mm", PackageReference=WDFN-10-511BM-01, PackageVersion="Rev. O, 06/2010", Packing="Tape and Reel", PartNumber=EMI4192MTTAG, RoHS=Pb-Free, VRWM Max (V)=5
U22: "DIODE, SS, DUAL, 85V, 0.125A, SOT523; Diode Type: Standard Recovery; Forward Current If_AV_: 215mA; Repetitive Revers...", Package="SOT-23 Micro Commercial", Availability=Unavailable, MF="Micro Commercial", MP=BAV199T, Price=None, SnapEDA_Link=https://www.snapeda.com/parts/BAV199T/Micro%20Commercial/view-part/?ref=snap
VD1: "Automotive Catalog Low-Capacitance 2-Channel %2B/-15 kV ESD-Protection Array for High-Speed Data Inter 5-SOT -40 to 85", ??????="??????? ??????", ??????=SOT-553, ?????????????="Texas Instruments"
Y1: "Mems Osc, 33.333333MHZ, 2X1.6MM, Lvcmos", Package="SMD-4 SiTime", Availability=Unavailable, MF=SiTIME, MP=SIT8008AI-73-33E-33.333333G, Price=None, SnapEDA_Link=https://www.snapeda.com/parts/SIT8008AI-73-33E-33.333333G/SiTIME/view-part/?ref=snap

## Nets (pads, with @x,y where several pads share a name; then routed paths per layer and width w, separated by ;. In a path a pad name is that pad's centre, name@x,y a point inside that pad or via, vN(x,y) a via of type N, cw(c..) or ccw(c..) an arc to the next point about the centre after c; other vN are vias at no path point)
"5V USB": C71.1 J2.A4 J2.A9 J2.B4 J2.B9 Q2.9 R63.1 U12.4 U14.1 U14.3 U14.5 VD1.1
"100 K": C40.2 C41.1
"*A0 DDR3": RN2.16 U4.N3
"*A1 DDR3": RN2.15 U4.P7
"*A2 DDR3": RN2.14 U4.P3
"*A3 DDR3": RN2.13 U4.N2
"*A4 DDR3": RN2.12 U4.P8
"*A5 DDR3": RN2.11 U4.P2
"*A6 DDR3": RN2.10 U4.R8
"*A7 DDR3": RN2.9 U4.R2
"*A8 DDR3": RN3.16 U4.T8
"*A9 DDR3": RN3.15 U4.R3
"*A10 DDR3": RN3.14 U4.L7
"*A11 DDR3": RN3.13 U4.R7
"*A12 DDR3": RN3.12 U4.N7
"*A13 DDR3": RN3.11 U4.T3
"*A14 DDR3": RN3.10 U4.T7
"*A15 DDR3": RN3.9 U4.M7
"*BA0 DDR3": RN1.11 U4.M2
"*BA1 DDR3": RN1.10 U4.N8
"*BA2 DDR3": RN1.9 U4.M3
*BT_REG_ON: R105.2 U15.8
"*CLK qSPI Flash": R45.2 R46.1 U11.6
*HDMI_CEC: J5.13 R109.2
*MIC0_OUT: C36.2 R14.1 TP4.1 U3.1
*MIC1_OUT: C38.2 R17.1 TP6.1 U3.4
"*nCAS DDR3": RN1.13 U4.K3
"*nCS DDR3": RN1.16 U4.L2
"*nRAS DDR3": RN1.14 U4.J3
"*nWE DDR3": RN1.12 U4.L3
"*ODT DDR3": RN1.15 U4.K1
"*SDID CLK WiFi": RN6.8 TP37.1 U15.20
"*SDID CMD WiFi": R84.1 RN6.3 TP44.1 U15.15
"*SDID D0 WiFi": R88.1 RN6.7 TP43.1 U15.14
"*SDID D1 WiFi": R87.1 RN6.6 TP42.1 U15.16
"*SDID D2 WiFi": R86.1 RN6.5 TP40.1 U15.17
"*SDID D3 WiFi": R85.1 RN6.4 TP39.1 U15.18
"*UART CTS USB": R56.1 U13.15
"*UART RTS USB": R55.1 U13.16
"*UART RXD USB": R53.1 U13.17
"*UART TXD USB": R54.1 U13.18
*USB_D_N: C74.1 R67.2 U13.5
*USB_D_P: C75.1 R66.2 U13.4
*WL_REG_ON: R102.1 R103.1 R106.2 U15.9
"A0 DDR3": RN2.1 U1.P1
"A1 DDR3": RN2.2 U1.N1
"A2 DDR3": RN2.3 U1.M1
"A3 DDR3": RN2.4 U1.M4
"A4 DDR3": RN2.5 U1.P3
"A5 DDR3": RN2.6 U1.P4
"A6 DDR3": RN2.7 U1.P5
"A7 DDR3": RN2.8 U1.M5
"A8 DDR3": RN3.1 U1.P6
"A9 DDR3": RN3.2 U1.N4
"A10 DDR3": RN3.3 U1.J1
"A11 DDR3": RN3.4 U1.L2
"A12 DDR3": RN3.5 U1.M2
"A13 DDR3": RN3.6 U1.K2
"A14 DDR3": RN3.7 U1.K1
"A15 DDR3": RN3.8
AD0N: U1.E13
AD0P: U1.F12
AD1N: U1.F14
AD1P: U1.F13
AD8N: U1.E12
AD8P: U1.E11
AD9N: U1.F15
AD9P: U1.G15
AGND: C20.2 C37.2 C39.2 L4.2 MK1.2 MK1.3 MK1.4 MK1.6 MK2.2 MK2.3 MK2.4 MK2.6 U1.F8 U1.G8 U1.H7 U3.2
Audio_N: U1.H8 U17.2
Audio_P: U1.G7 U17.1
AVCC: C20.1 C37.1 C39.1 L3.2 MK1.5 MK2.5 R12.1 R14.2 R15.1 R17.2 TP2.1 U1.F7 U3.7
"BA0 DDR3": RN1.6 U1.M6
"BA1 DDR3": RN1.7 U1.R1
"BA2 DDR3": RN1.8 U1.N6
"Batt charge SCL": U2.10 U12.28
"Batt charge SDA": U2.9 U12.1
BLE_DEV_WAKE: R89.1 R91.2 TP31.1 U15.40
BLE_HOST_WAKE: R90.1 R92.2 TP32.1 U15.41
BLE_ON: R105.1
BT_GPIO_2: R93.1 TP34.1 U15.64
BT_GPIO_3: TP35.1 U15.63
BT_GPIO_4: TP36.1 U15.62
BT_GPIO_5: TP38.1 U15.65
BT_I2S_CLK: TP33.1 U15.37
BT_I2S_DI: TP29.1 U15.42
BT_I2S_DO: TP30.1 U15.36
BT_I2S_WS: TP28.1 U15.38
BT_PCM_CLK: R94.1 U15.35
BT_PCM_IN: R96.1 U15.32
BT_PCM_OUT: TP41.1 U15.34
BT_PCM_SYNC: R95.1 U15.33
"Button RST": R36.1 S1.2
"CD SDIO Zync": RN4.10
"CK DDR3": R20.2 U1.N3 U4.J7
"CKE DDR3": R18.1 U1.L3 U4.K9
"CLK 32.768Hz WiFi": U15.30 U16.2
"CLK eMMC": RN5.1 U5.M6
"CLK qSPI Flash": R45.1 U1.A10
"CLK SDIO Zync": RN4.11 RN5.16 U1.B7
"CMD eMMC": RN5.2 U5.M5
"CMD SDIO Zync": RN4.12 RN5.15 U1.B10
"DAT0 eMMC": RN5.3 U5.A3
"DAT0 SDIO Zync": RN4.16 RN5.14 U1.D6
"DAT1 eMMC": RN5.4 U5.A4
"DAT1 SDIO Zync": RN4.15 RN5.13 U1.C6
"DAT2 eMMC": RN5.5 U5.A5
"DAT2 SDIO Zync": RN4.14 RN5.12 U1.B9
"DAT3 eMMC": RN5.6 U5.B2
"DAT3 SDIO Zync": RN4.13 RN5.11 U1.D10
"DAT4 eMMC": RN5.7 U5.B3
"DAT4 SDIO Zync": RN5.10
"DAT5 eMMC": RN5.8 U5.B4
"DAT5 SDIO Zync": RN5.9
"DAT6 eMMC": RN6.1 U5.B5
"DAT6 SDIO Zync": RN6.16
"DAT7 eMMC": RN6.2 U5.B6
"DAT7 SDIO Zync": RN6.15
DDR_VRN: R5.2 U1.J3
DDR_VRP: R4.2 U1.H3
"DML DDR3": U1.B1 U4.E7
"DMU DDR3": U1.D3 U4.D3
DONE: R9.1 U1.M7
"DQL0 DDR3": U1.D4 U4.E3
"DQL1 DDR3": U1.A2 U4.F7
"DQL2 DDR3": U1.C4 U4.F2
"DQL3 DDR3": U1.C1 U4.F8
"DQL4 DDR3": U1.B4 U4.H3
"DQL5 DDR3": U1.A4 U4.H8
"DQL6 DDR3": U1.C3 U4.G2
"DQL7 DDR3": U1.A3 U4.H7
"DQSL DDR3": U1.C2 U4.F3
"DQSU DDR3": U1.G2 U4.C7
"DQU0 DDR3": U1.E1 U4.D7
"DQU1 DDR3": U1.D1 U4.C3
"DQU2 DDR3": U1.E2 U4.C8
"DQU3 DDR3": U1.E3 U4.C2
"DQU4 DDR3": U1.F3 U4.A7
"DQU5 DDR3": U1.G1 U4.A2
"DQU6 DDR3": U1.H1 U4.B8
"DQU7 DDR3": U1.H2 U4.A3
"External SCL": U2.12 U18.13
"External SDA": U2.11 U18.15
GND: C1.1 C2.1 C3.2 C4.2 C5.2 C6.2 C7.2 C8.2 C9.2 C10.2 C11.2 C12.2 C13.2 C14.2 C15.2 C16.1 C17.1 C18.2 C19.2 C21.2 C22.2 C23.2 C24.2 C25.2 C26.2 C27.2 C28.2 C29.2 C30.2 C31.2 C32.2 C33.2 C34.2 C35.2 C41.2 C42.2 C43.2 C44.2 C45.2 C46.2 C47.2 C48.2 C49.2 C50.2 C51.2 C52.2 C53.2 C54.2 C55.2 C56.2 C57.2 C58.2 C59.2 C60.2 C61.2 C62.2 C63.2 C64.2 C65.2 C66.2 C67.2 C68.2 C69.2 C70.2 C71.2 C72.2 C73.2 C74.2 C75.2 C76.2 C77.2 C78.2 C79.2 C80.2 C81.2 C83.2 C84.2 C85.2 C86.2 C87.2 C88.2 C89.2 C90.2 C91.2 C92.2 C94.2 C96.2 C98.2 E1.1 E1.6 J1.6 J1.10 J2.A1 J2.A12 J2.B1 J2.B12 J3.2 J3.3 J3.4 J3.5 J4.2@1715,3258.07 J4.3@1715,3141.93 J5.2 J5.5 J5.8 J5.11 J5.17 L4.1 L7.1 L7.2 R2.2 R3.2 R4.1 R7.1 R18.2 R19.2 R21.2 R37.1 R39.2 R43.2 R47.2 R48.2 R49.2 R50.2 R57.1 R58.1 R59.1 R70.1 R71.1 R72.2 R73.1 R74.1 R91.1 R92.1 R93.2 R94.2 R95.2 R96.2 R97.1 R98.1 R99.2 R101.1 R108.1 R118.2 S1.1 S1.3 TP13.1 TP21.1 U1.A1 U1.A11 U1.B8 U1.C5 U1.C15 U1.D2 U1.D12 U1.E5 U1.E7 U1.E8 U1.E9 U1.F10 U1.G3 U1.G5 U1.G13 U1.H6 U1.H10 U1.J5 U1.J9 U1.K4 U1.K7 U1.K10 U1.K14 U1.L1 U1.L5 U1.L11 U1.M8 U1.N5 U1.N15 U1.P2 U1.P12 U1.R9 U2.1 U2.2 U2.8 U2.13 U4.A9 U4.B1 U4.B3 U4.B9 U4.D1 U4.D8 U4.E1 U4.E2 U4.E8 U4.F9 U4.G1 U4.G8 U4.G9 U4.J2 U4.J8 U4.M1 U4.M9 U4.P1 U4.P9 U4.T1 U4.T9 U5.A6 U5.C4 U5.E7 U5.G5 U5.H10 U5.J5 U5.K8 U5.N2 U5.N5 U5.P4 U5.P6 U6.3 U6.4 U6.17 U6.18 U6.19 U6.21 U7.2 U8.3 U8.4 U8.21 U9.3 U9.4 U9.17 U9.19 U9.21 U10.3 U10.4 U10.21 U11.4 U11.9 U12.29 U13.3 U13.12 U13.21 U15.10 U15.12 U15.13 U15.19 U15.21 U15.29 U15.39 U15.44 U15.49 U15.51 U15.52 U15.53 U15.55 U15.56 U15.58 U15.59 U15.60 U15.61 U15.66 U15.67 U15.68 U15.69 U15.70 U15.71 U15.72 U16.1 U16.4 U17.22 U18.21 U18.22 U19.3 U19.5 U19.9 U20.3 U20.8 U21.3 U21.8 VD1.4 Y1.2
"GND PVSS WiFi": C93.2 C95.2 C97.2 R97.2 U15.24 U15.26 U15.27
GPIO2: U1.K15
GPIO3: U1.J14 U17.3
GPIO4: U1.H12 U17.4
GPIO5: U1.N14 U17.5
GPIO6: U1.R15 U17.6
GPIO7: U1.L14 U17.7
GPIO8: U1.L15 U17.8
GPIO9: U1.J13 U17.9
GPIO10: U1.H14 U17.10
GPIO11: U1.J15 U17.11
GPIO12: U1.M15 U17.12
GPIO13: U1.R13 U17.13
GPIO14: U1.M12 U17.14
GPIO15: U1.N13 U17.15
GPIO16: U1.L13 U17.16
GPIO17: U1.G11 U17.17
GPIO18: U1.H11 U17.18
GPIO19: U1.R12 U17.19
GPIO20: U1.M14 U17.20
GPIO21: U1.P15 U18.1
GPIO22: U1.H13 U18.2
GPIO23: U1.J11 U18.3
GPIO24: U1.K11 U18.4
GPIO25: U1.K13 U18.5
GPIO26: U1.L12 U18.6
GPIO27: U1.G12 U18.7
"GPIO_0 WiFi": TP45.1 U15.2
"GPIO_1 WiFi": TP46.1 U15.5
"GPIO_2/TCK/SWCLK WiFi": TP47.1 U15.7
"GPIO_3/TMS/SWDIO WiFi": TP48.1 U15.3
"GPIO_4/TDIO WiFi": TP49.1 U15.6
"GPIO_5/TDO WiFi": TP50.1 U15.4
"GPIO_6/TRST WiFi": TP51.1 U15.1
GPIO_7: R99.1 TP52.1 U15.31
GPIO_PL_0: U1.N11 U18.8
GPIO_PL_1: U1.N12 U18.10
GPIO_PL_2: U1.P13 U18.12
GPIO_PL_3: U1.P14 U18.14
GPIO_PL_4: U1.M9 U18.16
GPIO_PL_5: U1.N9 U18.9
GPIO_PL_6: U1.M10 U18.11
GPIO_PL_7: TP53.1 U1.M11
GPIO_PL_8: U1.N7
GPIO_PL_9: U1.N8
"HDMI SCL": J5.15 U2.7
"HDMI SDA": J5.16 U2.6
HDMI_CEC: FB1.1 U1.K12
HDMI_CLK_N: J5.12 U21.9
HDMI_CLK_P: J5.10 U21.10
HDMI_IRQ: J5.19 R108.2 U1.D8
HDMI_T0_N: J5.9 U21.6
HDMI_T0_P: J5.7 U21.7
HDMI_T1_N: J5.6 U20.9
HDMI_T1_P: J5.4 U20.10
HDMI_T2_N: J5.3 U20.6
HDMI_T2_P: J5.1 U20.7
HDMI_TX0_N: U1.P8 U21.5
HDMI_TX0_P: U1.P9 U21.4
HDMI_TX1_N: U1.R10 U20.2
HDMI_TX1_P: U1.P10 U20.1
HDMI_TX2_N: U1.R11 U20.5
HDMI_TX2_P: U1.P11 U20.4
HDMI_TXC_N: U1.R7 U21.2
HDMI_TXC_P: U1.R8 U21.1
"I2C1 SCL": U1.B12 U2.14
"I2C1 SDA": U1.D13 U2.15
INIT: R10.1 U1.D5
"IO0 qSPI Flash": R48.1 U1.A8 U11.5
"IO1 qSPI Flash": R49.1 U1.A7 U11.2
"IO2 qSPI Flash": R50.1 U1.C8 U11.3
"IO3 qSPI Flash": R51.1 U1.A9 U11.7
"IRQ Acc": U12.3
"LDO 3.3V": R89.2 R90.2
MIC0_OUT: C36.1 MK1.1
MIC0_OUT_OP: R13.2 TP3.1 U3.9
MIC1_OUT: C38.1 MK2.1
MIC1_OUT_OP: R16.2 TP5.1 U3.6
MIO7: R2.1 U1.D9
MIO8: R3.1 U1.B6
MIO9: TP54.1 U1.B5
MIO34: TP55.1 U1.D15
MIO35: TP56.1 U1.A14
MIO36: TP57.1 U1.B14
MIO37: TP58.1 U1.C14
"nCAS DDR3": RN1.4 U1.R5
"nCK DDR3": R20.1 U1.N2 U4.K7
"nCS DDR3": RN1.1 U1.R2
"nCS qSPI Flash": R47.1 U1.A5 U11.1
"nDQSL DDR3": U1.B2 U4.G3
"nDQSU DDR3": U1.F2 U4.B7
NetC1_2: C1.2 C2.2 L1.1 U1.F5
NetC25_1: C25.1 C26.1 C27.1 C28.1 U1.J12 U1.M13 U1.N10 U1.P7 U1.R14
NetC62_1: C62.1 R34.1 U6.5 U6.6 U6.7 U6.15
NetC64_1: C64.1 R38.1 R40.1 U8.5 U8.6 U8.7 U8.15
NetC66_1: C66.1 R41.1 U9.5 U9.6 U9.7 U9.15
NetC68_1: C68.1 R42.1 R44.1 U10.5 U10.6 U10.7 U10.15
NetC73_1: C73.1 Q1.10 Q2.10 U12.23 U12.24 U12.25
NetC76_1: C76.1 U12.12
NetC82_1: C82.1 C83.1 R78.2
NetC82_2: C82.2 C84.1 J3.1 J4.1
NetC85_1: C85.1 R79.1 U15.50
NetC86_1: C86.1 R79.2 R80.1
NetC87_1: C87.1 R80.2 R81.1
NetC88_1: C88.1 C89.1 R81.2 R82.1
NetC90_1: C90.1 R76.1 R78.1 R82.2 R83.1
NetC91_1: C91.1 C92.1 R83.2
NetC96_1: C96.1 C97.1 L8.1 U15.25
NetC98_1: C98.1 FB1.2 R109.1 U22.3
NetC99_1: C99.1 C100.1 C101.1 C102.1 TP60.1
NetC99_2: C99.2 C100.2 C101.2 C102.2 C104.2 C106.1 C107.2 D2.2 U23.G2 U23.H1 U23.H2
NetC103_1: C103.1 C105.1 C106.2 D1.1 TP59.1 U23.G5 U23.H5 U23.H6
NetC103_2: C103.2 U23.G6
NetC104_1: C104.1 U23.G1
NetC105_2: C105.2 U23.A6
NetC107_1: C107.1 U23.A1
NetC108_1: C108.1 C109.1 C110.1 R114.2 U23.E1 U23.E2 U23.E5 U23.E6 U23.F2 U23.F3 U23.F4 U23.F5
NetC111_1: C111.1 U23.F1
NetC114_1: C114.1 U23.F6
NetJ1_4: J1.4 L5.2
NetJ1_5: J1.5 R27.1
NetJ2_A5: J2.A5 R57.2
NetJ2_B5: J2.B5 R58.2
NetL2_1: L2.1 Y1.1 Y1.4
NetL6_1: L6.1 U12.26 U12.27
NetL8_2: L8.2 U15.28
NetQ1_1: Q1.1 R60.2 U12.11
NetQ1_4: Q1.4 Q1.5
NetQ1_8: Q1.8 R60.1
NetQ2_1: Q2.1 R62.2 U12.9
NetQ2_4: Q2.4 Q2.5
NetQ2_8: Q2.8 R62.1 U14.6
NetQ3_3: Q3.3 U12.17
NetQ3_4: Q3.4 Q3.8 U12.19 U12.20
NetR8_1: R8.1 Y1.3
NetR12_2: R12.2 R13.1 U3.10
NetR15_2: R15.2 R16.1 U3.5
NetR32_1: R32.1 R37.2 U7.4
NetR38_2: R38.2 R39.1 U8.16
NetR42_2: R42.2 R43.1 U10.16
NetR61_1: R61.1 U12.7
NetR63_2: R63.2 U12.8
NetR64_1: R64.1 U13.7 U13.8
NetR65_2: R65.2 TP16.1
NetR68_1: R68.1 R69.1 U12.15
NetR68_2: R68.2 U12.14
NetR70_2: R70.2 U13.9
NetR71_2: R71.2 U14.2 U14.4
NetR72_1: R72.1 U12.18
NetR73_2: R73.2 U12.5
NetR74_2: R74.2 U12.6
NetR75_1: R75.1 R76.2 R77.1
NetR98_2: R98.2 U15.57
NetR100_2: R100.2 R101.2 R102.2 R103.2
NetR107_2: R107.2 U19.1
NetR110_2: R110.2 U22.1
NetR114_1: R114.1 U23.C2
NetR115_2: R115.2 U23.C4
NetR116_2: R116.2 R117.2 U23.B5
NetTP14_1: TP14.1 U13.13
NetTP15_1: TP15.1 U13.2
NetTP17_1: TP17.1 U13.1
NetTP18_1: TP18.1 U13.19
NetTP20_1: TP20.1 U13.20
NetTP22_1: TP22.1 U13.11
NetTP23_1: TP23.1 U13.14
NetTP61_1: TP61.1 U23.H4
nMRST: R35.1 R36.2 RN4.9 U2.3 U7.3 U19.10
"nRAS DDR3": RN1.3 U1.R6
"nRST DDR3": R19.1 U4.T2
"nRST eMMC": RN4.8 U5.K5
"nWE DDR3": RN1.5 U1.R3
"ODT DDR3": RN1.2 U1.K3
PGND: C108.2 C109.2 C110.2 C111.2 C112.2 C113.2 C114.2 D1.2 D2.1 R115.1 R117.1 R118.1 U23.A2 U23.B2 U23.B4 U23.C1 U23.C6 U23.I1 U23.I2 U23.I3 U23.I4 U23.I5 U23.I6
POR_B: R33.1 TP7.1 U1.C9 U7.1 U7.5
PROG_B: R11.1 U1.K6
PS_CLK: R8.2 U1.C7
PUDC: R1.1 U1.G14
"RAW VCC 5V": C112.1 C113.1 Q1.9 R61.2 U23.D1 U23.D2 U23.D3 U23.D4 U23.D5 U23.D6
SD_CD: J1.9 R25.2 RN4.7
SD_CLK: R27.2 RN4.6
SD_CMD: J1.3 R24.2 RN4.5
SD_D0: J1.7 R23.2 RN4.1
SD_D1: J1.8 R26.2 RN4.2
SD_D2: J1.1 R28.2 RN4.3
SD_D3: J1.2 R29.2 RN4.4
"SDID CLK WiFi": RN6.14 U1.A15
"SDID CMD WiFi": RN6.9 U1.D11
"SDID D0 WiFi": RN6.10 U1.B15
"SDID D1 WiFi": RN6.11 U1.C12
"SDID D2 WiFi": RN6.12 U1.E15
"SDID D3 WiFi": RN6.13 U1.C11
SHIELD: C70.1 J2.S1 J2.S2 J2.S3 J2.S4 J2.S5 J2.S6 J5.S1 J5.S2 J5.S3 J5.S4 R59.2
"TCK Zynq": U1.G9 U19.4
"TDI Zynq": U1.L7 U19.8
"TDO Zynq": U1.L8 U19.6
"Thermistor output": R69.2 TP19.1